# Altium PCB Morpheus_middle.PcbDoc (part 3 of 3)
Units mm, origin at the board's own origin, x right, y up, seen from the top; angles counter-clockwise.
Board outline 54.01 x 53.97 mm, 6 copper layers (Top Layer, Signal Layer 1, Signal Layer 2, GND, PWR, Bottom Layer), stack 0.657 mm thick; 151 components, 110 nets, 517 pads, 447 vias.
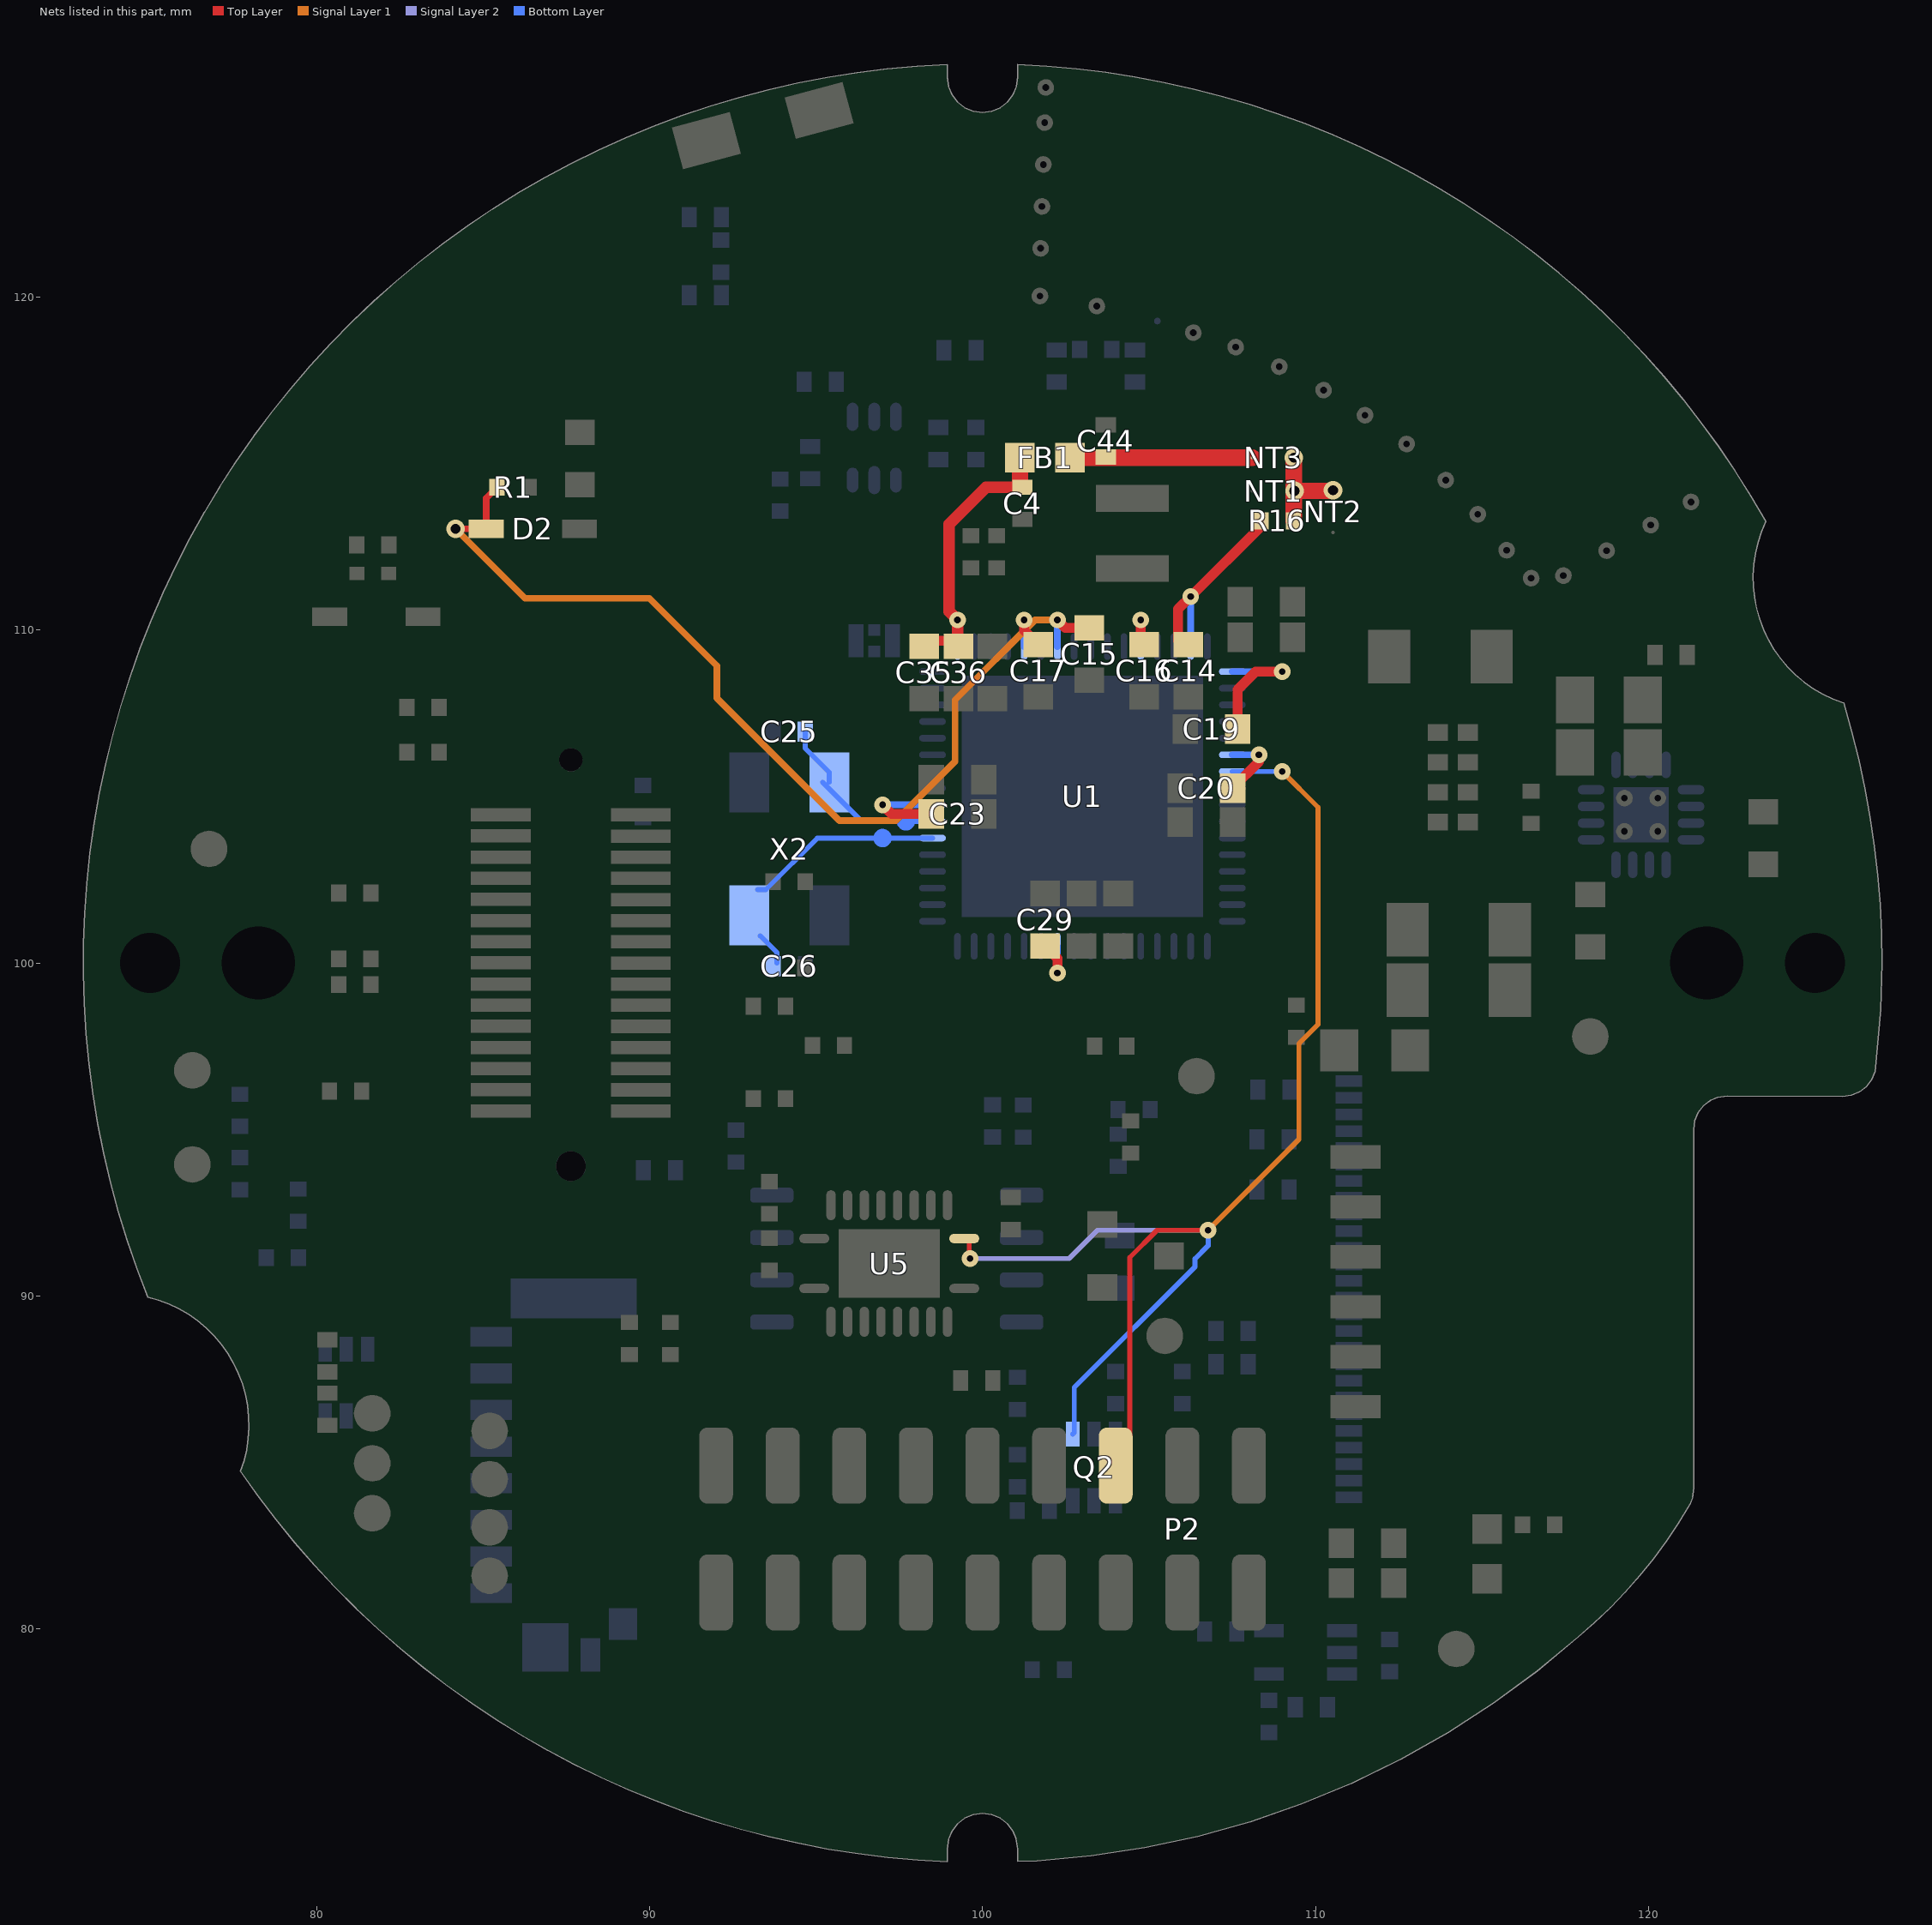
[diagram p7: the nets of this part, all layers, seen from the top]

## Via types
v1: diameter 0.559, hole 0.305, Top Layer to Bottom Layer, 105 vias
v2: diameter 0.5, hole 0.2, Top Layer to Bottom Layer, 104 vias
v3: diameter 0.5, hole 0.2, Top Layer to Bottom Layer, tented both sides, 66 vias
v4: diameter 0.51, hole 0.2, Top Layer to Bottom Layer, tented both sides, 64 vias
v5: diameter 0.51, hole 0.2, Top Layer to Bottom Layer, 58 vias
v6: diameter 0.6, hole 0.3, Top Layer to Bottom Layer, 33 vias
v7: diameter 0.559, hole 0.305, Top Layer to Bottom Layer, tented both sides, 16 vias
v8: diameter 0.559, hole 0.305, Top Layer to Bottom Layer, tented bottom, 1 vias

## Nets (pads, with @x,y where several pads share a name; then routed paths per layer and width w, separated by ;. In a path a pad name is that pad's centre, name@x,y a point inside that pad or via, vN(x,y) a via of type N, cw(c..) or ccw(c..) an arc to the next point about the centre after c; other vN are vias at no path point) (continued)
USB_TXD: P2.2 Q2.4 U1.55 U5.1 | length 42.1
  Top Layer w0.15: U5.1@99.6,91.725 99.6,91.15 v3(99.625,91.125) ; P2.2@104,84.905 104.425,85.33 104.425,91.158 105.242,91.975 v3(106.775,91.975)
  Signal Layer 1 w0.15: v3(106.775,91.975) 109.5,94.7 109.5,97.58 110.075,98.155 110.075,104.675 v2(109,105.75)
  Signal Layer 2 w0.15: v3(99.625,91.125) 102.6,91.125 103.45,91.975 v3(106.775,91.975)
  Bottom Layer w0.15: Q2.4@102.71,85.85 102.754,85.894 102.754,87.252 106.383,90.881 106.383,91.119 106.775,91.511 v3(106.775,91.975) ; U1.55@107.5,105.75 v2(109,105.75)
VBAT: C15.2 C16.2 C17.2 C20.2 C29.2 D2.1 NT1.1 NT2.1 NT3.2 R1.2 R16.1 U1.10 U1.37 U1.39 U1.44 U1.54 | length 40.3
  Top Layer w0.2: v7(84.176,113.035) D2.1@85.101,113.035 85.101,113.96 R1.2@85.426,114.285 ; C16.2@104.75,109.662 C16.2@104.85,109.562
  Top Layer w0.3: v2(101.25,110.3) 101.25,109.987 C17.2@101.675,109.562 ; C29.2@101.875,100.513 102.25,100.138 v2(102.25,99.7) ; v2(102.25,110.3) 102.488,110.062 C15.2@103.2,110.062 ; C16.2@104.75,109.662 v2(104.75,110.3) ; C20.2@107.5,105.25 108.3,106.05 v2(108.3,106.25)
  Top Layer w0.5: R16.1@109.35,113.275 NT1.1@109.35,114.175 ; v1(109.35,115.175) NT1.1@109.35,114.175 ; NT2.1@110.525,114.175 NT1.1@109.35,114.175
  Signal Layer 1 w0.2: v7(84.176,113.035) 86.261,110.95 89.997,110.95 92.021,108.926 92.021,107.958 95.704,104.275 97.397,104.275 99.175,106.053 99.175,107.896 101.579,110.3 v2(102.25,110.3)
  Bottom Layer w0.2: U1.37@101.25,109.5 v2(101.25,110.3) ; v2(102.25,99.7) U1.10@102.25,100.5 ; U1.39@102.25,109.5 v2(102.25,110.3) ; U1.44@104.75,109.5 v2(104.75,110.3) ; U1.54@107.5,106.25 v2(108.3,106.25)
  other v1: 109.37,114.175 110.525,114.195
VDD_ANA2: C14.2 R16.2 U1.47 | length 6.1
  Top Layer w0.3: C14.2@105.875,109.678 105.875,110.625 v2(106.25,111) 108.367,113.117 R16.2@108.367,113.275
  Bottom Layer w0.2: U1.47@106.25,109.5 v2(106.25,111)
VDD_PA_IN: C44.2 FB1.2 NT3.1 | length 5.6
  Top Layer w0.5: FB1.2@102.55,115.175 NT3.1@108.1,115.175
VDD_PA_IN_FILTERED: C4.2 C35.2 C36.2 FB1.1 U1.33 | length 8.9
  Top Layer w0.2: C36.2@99.2,109.675 C36.2@99.25,109.725
  Top Layer w0.3: C35.2@98.25,109.675 C36.2@99.2,109.675
  Top Layer w0.35: C36.2@99.25,109.725 v2(99.25,110.3) 99,110.55 99,113.175 100.108,114.283 C4.2@101.2,114.283
  Top Layer w0.5: C4.2@101.126,114.357 FB1.1@101.126,115.175
  Bottom Layer w0.2: U1.33@99.25,109.475 v2@99.25,110.275
VDD_PLL: C23.2 U1.24 | length 3.1
  Top Layer w0.3: v2(97,104.75) 97.275,104.475 C23.2@98.463,104.475
  Bottom Layer w0.2: v2(97,104.75) U1.24@98.5,104.75
VDD_RAM: C19.2 U1.49 | length 4.2
  Top Layer w0.3: C19.2@107.662,107.025 107.662,108.212 108.2,108.75 v2(109,108.75)
  Bottom Layer w0.2: U1.49@107.5,108.75 v2(109,108.75)
WLAN_XTALM: C26.2 U1.22 X2.3 | length 7.5
  Bottom Layer w0.15: X2.3@93.25,102.2 93.49,102.2 95.04,103.75 U1.22@98.5,103.75 ; X2.3@93.325,100.815 93.828,100.313 C26.2@93.828,100.003
  Bottom Layer w0.35: 97.1,103.75 ccw(c97,103.75) 97.1,103.75
WLAN_XTALP: C25.2 U1.23 X2.1 | length 6.2
  Bottom Layer w0.15: C25.2@94.678,106.95 94.678,106.447 95.4,105.725 X2.1@95.4,105.425 ; X2.1@95.2,105.425 96.369,104.256 97.694,104.256 97.7,104.25 U1.23@98.5,104.25
  Bottom Layer w0.35: 97.8,104.25 ccw(c97.7,104.25) 97.8,104.25
pads on no net: H1.1 H2.1 H3.1 H4.1 P5. RTC0.4 RTC0.7 U5.6 U5.7 U5.8 U5.9 U5.12 U5.13 U5.14 U5.15 U7.3 U7.6 U7.10

## Polygon pours and split planes (outlines as drawn)
GND on GND "GND on GND" (solid, remove dead copper, pour order 25): 82.175,79.708 cw(c95.759,96.008) 78.679,83.419 77.769,84.655 77.72,84.732 ccw(c74.023,86.125) 74.93,89.969 74.743,90.421 74.211,91.964 73.773,93.536 73.43,95.131 73.185,96.744 73.037,98.369 72.988,100 73.037,101.631 73.185,103.256 73.43,104.869 73.773,106.464 74.211,108.036 74.743,109.579 75.367,111.086 76.082,112.553 76.883,113.975 77.769,115.345 78.629,116.513 cw(c96.184,103.596) 82.11,120.238 83.341,121.264 84.655,122.231 86.026,123.117 87.447,123.918 88.914,124.633 90.421,125.257 91.964,125.789 93.536,126.227 95.131,126.57 96.744,126.815 98.369,126.963 98.941,126.98 98.941,126.6 98.977,126.326 99.083,126.071 99.251,125.851 99.47,125.683 99.726,125.577 100,125.541 100.274,125.577 100.53,125.683 100.749,125.851 100.917,126.071 101.023,126.326 101.059,126.6 101.05,126.981 101.631,126.963 103.256,126.815 104.869,126.57 106.465,126.227 108.036,125.789 109.579,125.257 111.086,124.633 112.553,123.918 113.975,123.117 115.345,122.231 116.659,121.264 117.89,120.238 cw(c104.737,104.456) 121.371,116.513 122.231,115.345 123.117,113.975 123.521,113.257 ccw(c127.087,111.558) 125.854,107.806 126.227,106.464 126.57,104.869 126.815,103.256 126.963,101.631 127.012,100 126.97,98.605 126.801,96.739 126.7,96.496 126.54,96.287 126.331,96.126 126.087,96.026 125.826,95.991 122.364,96 122.073,95.962 121.86,95.873 121.651,95.713 121.491,95.504 121.39,95.261 121.356,95 121.364,84.238 121.326,83.946 121.238,83.734 cw(c108.371,91.183) 117.89,79.762 116.659,78.736 115.345,77.769 113.975,76.883 112.553,76.082 111.086,75.367 109.579,74.743 108.036,74.211 106.465,73.773 104.869,73.43 103.256,73.185 101.631,73.037 101.05,73.019 101.05,73.4 101.01,73.706 100.917,73.93 100.749,74.149 100.53,74.317 100.274,74.423 100,74.459 99.726,74.423 99.47,74.317 99.251,74.149 99.083,73.93 98.977,73.674 98.941,73.4 98.95,73.02 98.352,73.038 96.744,73.185 95.131,73.43 93.536,73.773 91.964,74.211 90.421,74.743 88.914,75.367 87.447,76.082 86.026,76.883 84.655,77.769 83.341,78.736
GND on Top Layer "Top GND" (solid, remove dead copper, pour order 24): 82.175,79.708 cw(c95.759,96.008) 78.679,83.419 77.769,84.655 77.72,84.732 ccw(c74.023,86.125) 74.93,89.969 74.743,90.421 74.211,91.964 73.773,93.536 73.43,95.131 73.185,96.744 73.037,98.369 72.988,100 73.037,101.631 73.185,103.256 73.43,104.869 73.773,106.464 74.211,108.036 74.743,109.579 75.367,111.086 76.082,112.553 76.883,113.975 77.769,115.345 78.629,116.513 cw(c96.184,103.596) 82.11,120.238 83.341,121.264 84.655,122.231 86.026,123.117 87.447,123.918 88.914,124.633 90.421,125.257 91.964,125.789 93.536,126.227 95.131,126.57 96.744,126.815 98.369,126.963 98.941,126.98 98.941,126.6 98.977,126.326 99.083,126.071 99.251,125.851 99.47,125.683 99.726,125.577 100,125.541 100.274,125.577 100.53,125.683 100.749,125.851 100.917,126.071 101.023,126.326 101.059,126.6 101.05,126.981 101.631,126.963 103.256,126.815 104.869,126.57 106.465,126.227 108.036,125.789 109.579,125.257 111.086,124.633 112.553,123.918 113.975,123.117 115.345,122.231 116.659,121.264 117.89,120.238 cw(c104.737,104.456) 121.371,116.513 122.231,115.345 123.117,113.975 123.521,113.257 ccw(c127.087,111.558) 125.854,107.806 126.227,106.464 126.57,104.869 126.815,103.256 126.963,101.631 127.012,100 126.97,98.605 126.801,96.739 126.7,96.496 126.54,96.287 126.331,96.126 126.087,96.026 125.826,95.991 122.364,96 122.073,95.962 121.86,95.873 121.651,95.713 121.491,95.504 121.39,95.261 121.356,95 121.364,84.238 121.326,83.946 121.238,83.734 cw(c108.371,91.183) 117.89,79.762 116.659,78.736 115.345,77.769 113.975,76.883 112.553,76.082 111.086,75.367 109.579,74.743 108.036,74.211 106.465,73.773 104.869,73.43 103.256,73.185 101.631,73.037 101.05,73.019 101.05,73.4 101.01,73.706 100.917,73.93 100.749,74.149 100.53,74.317 100.274,74.423 100,74.459 99.726,74.423 99.47,74.317 99.251,74.149 99.083,73.93 98.977,73.674 98.941,73.4 98.95,73.02 98.352,73.038 96.744,73.185 95.131,73.43 93.536,73.773 91.964,74.211 90.421,74.743 88.914,75.367 87.447,76.082 86.026,76.883 84.655,77.769 83.341,78.736
1.8V on Top Layer "1.8V AT LDO on Top" (solid, remove dead copper, pour order 23): 115.263,106.125 115.263,107.188 115.275,107.2 115.475,107.4 115.475,107.402 116.223,107.402 116.347,107.525 116.347,108.209 116.525,108.387 116.538,108.4 116.775,108.4 117.777,108.4 118.149,108.028 118.149,106.099 117.9,105.85 115.453,105.85 115.262,106.041
1.8V on Top Layer "1.8V AT BULK CAP TOP" (solid, remove dead copper, pour order 21): 112.833,110 112.833,108.416 112.825,108.408 111.55,108.408 110.825,109.133 110.805,109.153 110.805,111.375 110.961,111.532 112.05,111.532 112.213,111.532 112.345,111.4 112.345,110.5
GND on Bottom Layer "Bottom GND" (solid, remove dead copper, pour order 22): 82.175,79.708 cw(c95.759,96.008) 78.679,83.419 77.769,84.655 77.72,84.732 ccw(c74.023,86.125) 74.93,89.969 74.743,90.421 74.211,91.964 73.773,93.536 73.43,95.131 73.185,96.744 73.037,98.369 72.988,100 73.037,101.631 73.185,103.256 73.43,104.869 73.773,106.464 74.211,108.036 74.743,109.579 75.367,111.086 76.082,112.553 76.883,113.975 77.769,115.345 78.629,116.513 cw(c96.184,103.596) 82.11,120.238 83.341,121.264 84.655,122.231 86.026,123.117 87.447,123.918 88.914,124.633 90.421,125.257 91.964,125.789 93.536,126.227 95.131,126.57 96.744,126.815 98.369,126.963 98.941,126.98 98.941,126.6 98.977,126.326 99.083,126.071 99.251,125.851 99.47,125.683 99.726,125.577 100,125.541 100.274,125.577 100.53,125.683 100.749,125.851 100.917,126.071 101.023,126.326 101.059,126.6 101.05,126.981 101.631,126.963 103.256,126.815 104.869,126.57 106.465,126.227 108.036,125.789 109.579,125.257 111.086,124.633 112.553,123.918 113.975,123.117 115.345,122.231 116.659,121.264 117.89,120.238 cw(c104.737,104.456) 121.371,116.513 122.231,115.345 123.117,113.975 123.521,113.257 ccw(c127.087,111.558) 125.854,107.806 126.227,106.464 126.57,104.869 126.815,103.256 126.963,101.631 127.012,100 126.97,98.605 126.801,96.739 126.7,96.496 126.54,96.287 126.331,96.126 126.087,96.026 125.826,95.991 122.364,96 122.073,95.962 121.86,95.873 121.651,95.713 121.491,95.504 121.39,95.261 121.356,95 121.364,84.238 121.326,83.946 121.238,83.734 cw(c108.371,91.183) 117.89,79.762 116.659,78.736 115.345,77.769 113.975,76.883 112.553,76.082 111.086,75.367 109.579,74.743 108.036,74.211 106.465,73.773 104.869,73.43 103.256,73.185 101.631,73.037 101.05,73.019 101.05,73.4 101.01,73.706 100.917,73.93 100.749,74.149 100.53,74.317 100.274,74.423 100,74.459 99.726,74.423 99.47,74.317 99.251,74.149 99.083,73.93 98.977,73.674 98.941,73.4 98.95,73.02 98.352,73.038 96.744,73.185 95.131,73.43 93.536,73.773 91.964,74.211 90.421,74.743 88.914,75.367 87.447,76.082 86.026,76.883 84.655,77.769 83.341,78.736
1.8V on Bottom Layer "1.8V AT LDO on BOT" (solid, remove dead copper, pour order 19): 118.275,105.2 118.275,104.5 117.35,104.5 116.344,105.175 116.203,105.85 115.413,105.85 115.325,105.936 115.325,107.338 115.425,107.436 116.166,107.521 116.166,108.065 116.35,108.331 116.942,108.331 117.134,108.065 117.134,107.66 118.025,106.874 118.025,105.375 118.254,105.375 118.275,105.354
3.3V on Bottom Layer "3.3V" (solid, remove dead copper, pour order 18): 118.2,104.375 118.325,104.325 118.325,103.564 118.752,103.101 119.154,103.1 119.175,103.088 119.175,102.765 118.621,102.211 116.686,102.211 116.5,102.397 116.5,104.107 116.501,104.107 116.769,104.375
1.8V on Bottom Layer "1.8V AT BULK CAP BOT" (solid, remove dead copper, pour order 20): 112.833,110 112.833,108.416 112.825,108.408 111.55,108.408 110.825,109.133 110.805,109.153 110.805,111.375 110.961,111.532 112.05,111.532 112.213,111.532 112.345,111.4 112.345,110.5
GND on Signal Layer 2 "Sig2 GND" (solid, remove dead copper, pour order 17): 98.95,73.02 98.941,73.4 98.977,73.674 99.083,73.93 99.251,74.149 99.47,74.317 99.726,74.423 100,74.459 100.274,74.423 100.53,74.317 100.749,74.149 100.917,73.93 101.01,73.706 101.05,73.4 101.05,73.019 101.631,73.037 103.256,73.185 104.869,73.43 106.465,73.773 108.036,74.211 109.579,74.743 111.086,75.367 112.553,76.082 113.975,76.883 115.345,77.769 116.659,78.736 117.89,79.762 ccw(c108.371,91.183) 121.238,83.734 121.326,83.946 121.364,84.238 121.356,95 121.39,95.261 121.491,95.504 121.651,95.713 121.86,95.873 122.073,95.962 122.364,96 125.826,95.991 126.087,96.026 126.331,96.126 126.54,96.287 126.7,96.496 126.801,96.739 126.97,98.605 127.012,100 ccw(c100,100) 125.859,107.808 125.854,107.806 cw(c127.087,111.558) 123.521,113.257 ccw(c100,100) 101.05,126.98 101.05,126.981 101.059,126.6 101.023,126.326 100.917,126.071 100.749,125.851 100.53,125.683 100.274,125.577 100,125.541 99.726,125.577 99.47,125.683 99.251,125.851 99.083,126.071 98.977,126.326 98.941,126.6 98.941,126.98 ccw(c100,100) 74.931,89.97 74.93,89.969 cw(c74.023,86.125) 77.72,84.732 ccw(c99.991,100.005)
GND on Signal Layer 1 "Sig1 GND" (solid, remove dead copper, pour order 15): 98.95,73.02 98.941,73.4 98.977,73.674 99.083,73.93 99.251,74.149 99.47,74.317 99.726,74.423 100,74.459 100.274,74.423 100.53,74.317 100.749,74.149 100.917,73.93 101.01,73.706 101.05,73.4 101.05,73.019 101.631,73.037 103.256,73.185 104.869,73.43 106.465,73.773 108.036,74.211 109.579,74.743 111.086,75.367 112.553,76.082 113.975,76.883 115.345,77.769 116.659,78.736 117.89,79.762 ccw(c108.371,91.183) 121.238,83.734 121.326,83.946 121.364,84.238 121.356,95 121.39,95.261 121.491,95.504 121.651,95.713 121.86,95.873 122.073,95.962 122.364,96 125.826,95.991 126.087,96.026 126.331,96.126 126.54,96.287 126.7,96.496 126.801,96.739 126.97,98.605 127.012,100 ccw(c100,100) 125.859,107.808 125.854,107.806 cw(c127.087,111.558) 123.521,113.257 ccw(c100,100) 101.05,126.98 101.05,126.981 101.059,126.6 101.023,126.326 100.917,126.071 100.749,125.851 100.53,125.683 100.274,125.577 100,125.541 99.726,125.577 99.47,125.683 99.251,125.851 99.083,126.071 98.977,126.326 98.941,126.6 98.941,126.98 ccw(c100,100) 74.931,89.97 74.93,89.969 cw(c74.023,86.125) 77.72,84.732 ccw(c99.991,100.005)
GND on PWR "GND" (solid, remove dead copper, pour order 16): 94.6,126.7 89.625,125 85.3,122.875 85.3,122.873 94.7,108.85 98,106.075 98,105.325 99.725,103.35 101.2,103.35 101.2,105.5 101.2,106.825 101.2,107.825 100.2,110.325 98.75,111.625 98.75,112.975 100.85,115.575 110.25,115.575 112.6,113.325 114.525,111.875 116.4,110.8 117.322,110.73 122.993,114.15 121.9,115.8 120.675,117.4 119.101,119.101 117.725,120.4 116.002,121.747 114.1,123.075 111.879,124.325 109.55,125.275 106.95,126.125 104.375,126.675 101.975,127 99.525,127.075
1.8V on PWR "1.8V" (solid, remove dead copper, pour order 26): 82.175,79.708 cw(c95.759,96.008) 78.679,83.419 77.769,84.655 77.72,84.732 ccw(c74.023,86.125) 74.93,89.969 74.743,90.421 74.211,91.964 73.773,93.536 73.43,95.131 73.185,96.744 73.037,98.369 72.988,100 73.037,101.631 73.185,103.256 73.43,104.869 73.773,106.464 74.211,108.036 74.743,109.579 75.367,111.086 76.082,112.553 76.883,113.975 77.769,115.345 78.629,116.513 cw(c96.184,103.596) 82.11,120.238 83.341,121.264 84.655,122.231 86.026,123.117 87.447,123.918 88.914,124.633 90.421,125.257 91.964,125.789 93.536,126.227 95.131,126.57 96.744,126.815 98.369,126.963 98.941,126.98 98.941,126.6 98.977,126.326 99.083,126.071 99.251,125.851 99.47,125.683 99.726,125.577 100,125.541 100.274,125.577 100.53,125.683 100.749,125.851 100.917,126.071 101.023,126.326 101.059,126.6 101.05,126.981 101.631,126.963 103.256,126.815 104.869,126.57 106.465,126.227 108.036,125.789 109.579,125.257 111.086,124.633 112.553,123.918 113.975,123.117 115.345,122.231 116.659,121.264 117.89,120.238 cw(c104.737,104.456) 121.371,116.513 122.231,115.345 123.117,113.975 123.521,113.257 ccw(c127.087,111.558) 125.854,107.806 126.227,106.464 126.57,104.869 126.815,103.256 126.963,101.631 127.012,100 126.97,98.605 126.801,96.739 126.7,96.496 126.54,96.287 126.331,96.126 126.087,96.026 125.826,95.991 122.364,96 122.073,95.962 121.86,95.873 121.651,95.713 121.491,95.504 121.39,95.261 121.356,95 121.364,84.238 121.326,83.946 121.238,83.734 cw(c108.371,91.183) 117.89,79.762 116.659,78.736 115.345,77.769 113.975,76.883 112.553,76.082 111.086,75.367 109.579,74.743 108.036,74.211 106.465,73.773 104.869,73.43 103.256,73.185 101.631,73.037 101.05,73.019 101.05,73.4 101.01,73.706 100.917,73.93 100.749,74.149 100.53,74.317 100.274,74.423 100,74.459 99.726,74.423 99.47,74.317 99.251,74.149 99.083,73.93 98.977,73.674 98.941,73.4 98.95,73.02 98.352,73.038 96.744,73.185 95.131,73.43 93.536,73.773 91.964,74.211 90.421,74.743 88.914,75.367 87.447,76.082 86.026,76.883 84.655,77.769 83.341,78.736
VBAT on PWR "VBAT" (solid, pour order 14): 101.557,99.05 101.55,107 100.25,110.3 100.825,111.025 101.575,111.775 103.075,113.275 105.325,115.525 110.1,115.525 110.95,114.675 110.95,113.825 109.652,113.82 109.652,104.175 108.05,102.575 108.044,100.35 108.05,100.35 106.75,99.05

## Keep-outs
Keep-Out Layer:
  lines w0.15: 74.93,89.969 cw(c74.023,86.125) 77.72,84.732 ccw(c100,100) 98.95,73.011 ; 74.931,89.97 cw(c100,100) 98.941,126.98 98.941,126.6 98.977,126.326 99.083,126.071 99.251,125.851 99.471,125.683 99.726,125.577 100,125.541 100.274,125.577 100.53,125.683 100.749,125.851 100.917,126.071 101.023,126.326 101.059,126.6 101.05,126.981 ; 98.95,73.02 98.941,73.4 98.977,73.674 99.083,73.929 99.251,74.149 99.471,74.317 99.726,74.423 100,74.459 100.274,74.423 100.53,74.317 100.749,74.149 100.917,73.929 101.01,73.706 101.05,73.4 101.05,73.019 101.631,73.037 103.256,73.185 104.869,73.43 106.465,73.773 108.036,74.211 109.579,74.743 111.086,75.367 112.553,76.082 113.975,76.883 115.345,77.769 116.659,78.736 117.89,79.762 ccw(c108.371,91.183) 121.238,83.734 121.326,83.946 121.364,84.238 121.356,95 121.39,95.261 121.491,95.504 121.651,95.713 121.86,95.874 122.073,95.962 122.364,96 125.826,95.991 126.087,96.026 126.331,96.127 126.54,96.287 126.7,96.496 126.801,96.739 126.97,98.605 127.012,100 ccw(c100,100) 125.859,107.808 ; 101.05,126.98 cw(c100,100) 123.521,113.257 ccw(c127.087,111.558) 125.854,107.806

## Other copper
Bottom Layer:
  rectangle net GND: 95.8,109.175 96,110.175
  region net GND: 97.95,110.175 97.5,110.175 97.5,109.175 97.95,109.175
  rectangle net GND: 102.675,119.35 103.25,120.1
  pour cut-out: 98.85,107.325 97.85,107.325 cw(c97.85,109.35) 95.825,109.35 95.825,111.5 95.825,114.823 cw(c96.002,114.823) 96.002,115 97.498,115 cw(c97.498,114.823) 97.675,114.823 97.675,113.556 97.675,109.35 ccw(c97.85,109.35) 97.85,109.175 98.85,109.175
  pour cut-out: 97.498,115.9 ccw(c97.498,116.077) 97.675,116.077 cw(c98,116.077) 98,116.402 ccw(c98,116.729) 98.327,116.729 98.327,116.962 cw(c98.84,116.962) 98.84,117.475 99.808,117.475 102.225,117.5 103.883,117.5 104.608,117.5 ccw(c104.608,119.036) 106.144,119.036 106.2,119.25 104.425,119.75 104.357,119.514 cw(c103.96,119.911) 103.96,119.35 103.883,119.35 102.225,119.35 99.808,119.325 98.842,119.325 ccw(c98.842,117.233) 96.75,117.233 96.75,115.9
  pour cut-out: 89.817,125 93.117,126.025 93.775,123.6 93.075,123.225 93.083,120.05 93.083,119.935 ccw(c94.642,119.935) 94.642,118.375 95.608,118.375 cw(c95.608,117.233) 96.75,117.233 96.75,115.9 96.002,115.9 cw(c96.002,116.077) 95.825,116.077 ccw(c95.377,116.077) 95.377,116.525 94.642,116.525 93.85,116.601 93.117,116.875 92.575,117.233 92.05,117.7 91.635,118.312 91.323,119.101 91.233,119.935 91.233,120.05 91.225,123.225 90.35,123.225
Multi-Layer:
  pour cut-out: 102.675,108.95 103.725,108.95 103.725,108.75 105.65,108.75 105.65,107.175 105.3,106.825 102.155,106.829 102.154,107.425 101.175,107.425 101.175,108.5 102.675,108.5
  pour cut-out: 93.117,126.025 93.775,123.6 93.075,123.225 93,122.975 92.9,122.75 92.725,122.55 92.5,122.425 92.225,122.35 91.9,122.375 91.65,122.5 91.45,122.675 91.3,122.925 91.225,123.225 90.35,123.225 89.817,125 91.433,125.603

## Silkscreen, mask and mechanical layers (free items; w line width, h text height)
Bottom Overlay:
  region: 84.972,108.751 84.307,108.751 ccw(c84.64,108.751) 84.64,108.419 ccw(c84.64,108.751) 84.972,108.751
  region: 85.305,108.086 85.305,109.084 ccw(c84.973,109.084) 84.973,109.417 84.307,109.417 ccw(c84.307,109.084) 83.974,109.084 83.974,108.418 ccw(c84.307,108.418) 84.307,108.086 85.305,108.086 84.64,108.254 ccw(c84.64,108.751) 85.137,108.751 ccw(c84.64,108.751) 84.64,109.248 ccw(c84.64,108.751) 84.143,108.751 ccw(c84.64,108.751) 84.64,108.254
  lines w0.01: 83.974,108.418 ccw(c84.307,108.418) 84.307,108.086 84.64,108.086 85.305,108.086 85.305,109.084 ccw(c84.973,109.084) 84.973,109.417 84.307,109.417 ccw(c84.307,109.084) 83.974,109.084 83.974,108.418 ; 84.143,108.751 ccw(c84.64,108.751) 84.64,108.254 ccw(c84.64,108.751) 85.137,108.751 ccw(c84.64,108.751) 84.64,109.248 ccw(c84.64,108.751) 84.143,108.751 ; 84.307,108.751 ccw(c84.64,108.751) 84.64,108.419 ccw(c84.64,108.751) 84.972,108.751 84.307,108.751
  text "Model MA14214" at 88.3,109.85 h0.7
  text "2015   Hello Inc." at 88.3,108.4 h0.7
  text "905-00004-A" at 88.3,106.925 h0.7
Mechanical 1:
  lines w0.15: 74.93,89.969 cw(c74.023,86.125) 77.72,84.732 ; 74.931,89.97 cw(c100,100) 98.941,126.98 98.941,126.6 98.977,126.326 99.083,126.071 99.251,125.851 99.471,125.683 99.726,125.577 100,125.541 100.274,125.577 100.53,125.683 100.749,125.851 100.917,126.071 101.023,126.326 101.059,126.6 101.05,126.981 ; 77.719,84.732 ccw(c100,100) 98.95,73.01 ; 98.95,73.02 98.941,73.4 98.977,73.674 99.083,73.929 99.251,74.149 99.471,74.317 99.726,74.423 100,74.459 100.274,74.423 100.53,74.317 100.749,74.149 100.917,73.929 101.01,73.706 101.05,73.4 101.05,73.019 101.631,73.037 103.256,73.185 104.869,73.43 106.465,73.773 108.036,74.211 109.579,74.743 111.086,75.367 112.553,76.082 113.975,76.883 115.345,77.769 116.659,78.736 117.89,79.762 ccw(c108.371,91.183) 121.238,83.734 121.326,83.946 121.364,84.238 121.356,95 121.39,95.261 121.491,95.504 121.651,95.713 121.86,95.874 122.073,95.962 122.364,96 125.826,95.991 126.087,96.026 126.331,96.127 126.54,96.287 126.7,96.496 126.801,96.739 126.97,98.605 127.012,100 ccw(c100,100) 125.859,107.808 ; 101.05,126.98 cw(c100,100) 123.521,113.257 ccw(c127.087,111.558) 125.854,107.806
Mechanical 15:
  lines w0.004: 90.776,125.484 cw(c99.988,99.998) 92.201,125.955 cw(c99.988,99.998) 94.136,126.459 ; 92.133,125.877 92.17,125.731 92.39,124.868 90.937,124.497 90.776,125.483 ; 95.634,126.594 95.778,125.714 ; 90.776,125.483 90.776,125.483 ; 90.776,125.483 90.8,125.333 90.776,125.483 ; 94.136,126.459 cw(c99.988,99.998) 95.609,126.742 95.778,125.714 ; 94.136,126.459 94.161,126.31 94.298,125.472 ; 94.136,126.459 94.298,125.472 ; 94.298,125.472 95.778,125.714 ; 90.069,124.777 90.069,124.777
  lines w0.05: 89.425,89.775 99.225,89.775 99.225,78.775 89.425,78.775 89.425,78.925 ; 89.425,78.925 83.925,78.925 83.925,90.325 89.425,90.325 89.425,78.925 ; 97.8,107.725 97.8,110.325 98.7,110.325 98.7,107.725 97.8,107.725
Mechanical 16:
  lines w0.05: 89.817,125 90.35,123.225 91.225,123.225 ; 91.233,120.05 92.158,120.05 93.083,120.05 ; 93.117,126.025 93.775,123.6 93.075,123.225 ; 95.173,116.962 96.098,116.962 97.023,116.962 ; 95.175,116.4 96.1,116.4 97.025,116.4 ; 95.608,116.525 95.608,117.45 95.608,118.375 ; 96.475,116.4 97.4,116.4 98.325,116.4 ccw(c98.325,116.402) 98.327,116.402 ; 96.477,116.962 97.402,116.962 98.327,116.962 ; 91.225,123.225 92.15,123.225 93.075,123.225 ; 91.225,123.225 91.233,122.4 ; 91.233,122.4 ccw(c91.233,122.4) 91.233,122.4 ; 91.233,122.4 92.158,122.4 93.083,122.4 ; 91.233,122.4 91.233,119.935 ccw(c94.642,119.935) 94.642,116.525 ; 93.075,123.225 93.083,122.4 ; 93.083,122.4 ccw(c93.083,122.4) 93.083,122.4 ; 93.083,122.4 93.083,119.935 ccw(c94.642,119.935) 94.642,118.375 ; 94.642,116.525 94.642,117.45 94.642,118.375 ; 94.642,116.525 95.377,116.525 cw(c95.377,116.077) 95.825,116.077 ccw(c96.002,116.077) 96.002,115.9 97.498,115.9 ccw(c97.498,116.077) 97.675,116.077 cw(c98,116.077) 98,116.402 ccw(c98,116.729) 98.327,116.729 98.327,116.96 cw(c98.842,116.96) 98.842,117.475 ; 94.642,118.375 95.608,118.375 ; 95.608,118.375 cw(c95.608,117.233) 96.75,117.233 ; 95.825,109.35 ccw(c97.85,109.35) 97.85,107.325 ; 95.825,109.35 95.825,111.5 ; 95.825,109.35 96.75,109.35 97.675,109.35 ; 95.825,111.5 95.825,113.556 ; 95.825,111.5 95.825,111.5 ; 95.825,111.5 96.75,111.5 97.675,111.5 ; 95.825,113.556 96.75,113.556 97.675,113.556 ; 95.825,113.556 95.825,114.823 cw(c96.002,114.823) 96.002,115 97.498,115 cw(c97.498,114.823) 97.675,114.823 97.675,113.556 ; 96.75,117.233 cw(c98.842,117.233) 98.842,119.325 ; 96.75,117.233 96.75,116.962 96.75,117.233 ; 97.675,109.35 ccw(c97.85,109.35) 97.85,109.175 ; 97.675,109.35 97.675,111.5 ; 97.675,111.5 97.675,113.556 ; 97.675,111.5 97.675,111.5 ; 97.675,113.556 97.675,113.556 ; 97.85,107.325 98.85,107.325 98.85,108.25 98.85,109.175 97.85,109.175 ; 97.85,107.325 97.85,108.25 97.85,109.175 ; 98.842,117.475 98.842,118.4 98.842,119.325 ; 98.842,117.475 99.808,117.475 ; 98.842,119.325 99.808,119.325 ; 99.808,117.475 99.808,118.4 99.808,119.325 ; 99.808,117.475 102.225,117.5 ; 99.808,119.325 102.225,119.35 ; 102.225,117.5 102.225,118.425 102.225,119.35 ; 102.225,117.5 102.917,117.5 ; 102.225,119.35 102.917,119.35 ; 102.917,117.5 102.917,118.425 102.917,119.35 ; 102.917,117.5 103.883,117.5 ; 102.917,119.35 103.883,119.35 ; 103.883,117.5 103.883,118.425 103.883,119.35 ; 103.883,117.5 104.575,117.5 104.608,117.5 ccw(c104.608,119.036) 106.144,119.036 ; 103.883,119.35 103.96,119.35 ccw(c103.96,119.911) 104.357,119.514 ; 104.357,119.514 105.25,119.275 106.144,119.036 ; 104.357,119.514 104.425,119.75 106.2,119.25 106.144,119.036
Drill Drawing:
  drawing of 3415 lines, arcs and shapes, not listed
  text "6" at 115.636,286.171 h2.38
  text "5" at 165.928,286.185 h2.38
  text "2" at 316.355,286.157 h2.38
  text "4" at 216.362,286.143 h2.38
  text "8" at 14.3,286.038 h2.38
  text "1" at 367.825,286.001 h2.38
  text "3" at 266.361,285.987 h2.38
  text "7" at 66.164,285.965 h2.38
  text "Fabrication / Assembly Notes" at 75.178,272.937 h3
  text "1. Material: Rigid FR-4, RoHS compliant: material should meet or exceed requirements of IPC 4101/126.  ITEQ IT-180A Pre-approved." at 75.178,269.937 h1.52
  text "2. Number of electrical layers: 6" at 75.178,266.937 h1.52
  text "3. Trace / Space minimum: 5mil (all layers)" at 75.178,263.937 h1.52
  text "4. Thickness: 0.782mm (31mils) +/- 0.1mm finished" at 75.178,260.937 h1.52
  text "5. Finish:  ENIG plating on exposed copper" at 75.178,257.937 h1.52
  text "6. Soldermask: per IPC-SM-840, color matte black, registration within +/- 76um of circuit layer" at 75.178,254.937 h1.52
  text "D" at 394.849,251.989 h2.38
  text "7. Silkscreen: do printed silkscreen on top and bottom layers, color white.  Clip on pads." at 75.178,251.937 h1.52
  text "D" at -13.144,251.139 h2.38
  text "8. Board must be lead free process compatible and able to withstand minimum of" at 75.175,249.125 h1.52
  text "5 cycles at 250 degrees celsius" at 79.475,246.475 h1.52
  text "9. All Test/QA/QC markings to be made on back side of PCB" at 75.175,243.55 h1.52
  text "10. x mousebites shall be no larger than 0.05 mm" at 75.175,240.825 h1.52
  text "11. All Dimensions are after plating/finishing" at 75.1,238.2 h1.52
  text "12. All components must be placed within +/- 0.10mm" at 75.1,235.3 h1.52
  text "13. This board has controlled impedences between Layers 5 and 6." at 75.1,232.1 h1.52
  text "0.45mm traces on Bottom layer (layer 6) are 50 ohm +/-5 Ohm controlled impedence traces referenced to layer 5." at 80.65,229.45 h1.52
  text "Fab vendor to adjust trace width as needed but no smaller than .125mm without approval." at 80.6,226.6 h1.52
  text "Layer" at 76.249,219.373 h1.52
  text "Name" at 86.661,219.373 h1.52
  text "Material" at 110.53,219.373 h1.52
  text "Thickness" at 132.368,219.373 h1.52
  text "Constant" at 148.874,219.373 h1.52
  text "Board Layer Stack" at 163.348,219.373 h1.52
  text "1" at 76.249,216.325 h1.52
  text "Top Paste" at 86.661,216.325 h1.52
  text "2" at 76.249,213.277 h1.52
  text "Top Overlay" at 86.661,213.277 h1.52
  text "3" at 76.249,210.229 h1.52
  text "Top Solder" at 86.661,210.229 h1.52
  text "Solder Resist" at 110.53,210.229 h1.52
  text "0.010mm" at 132.368,210.229 h1.52
  text "3.5" at 148.874,210.229 h1.52
  text "4" at 76.249,207.181 h1.52
  text "Top Layer" at 86.661,207.181 h1.52
  text "Copper" at 110.53,207.181 h1.52
  text "0.025mm" at 132.368,207.181 h1.52
  text "5" at 76.249,204.133 h1.52
  text "Dielectric1" at 86.661,204.133 h1.52
  text "FR-4" at 110.53,204.133 h1.52
  text "0.102mm" at 132.368,204.133 h1.52
  text "4.2" at 148.874,204.133 h1.52
  text "6" at 76.249,201.085 h1.52
  text "Signal Layer 1" at 86.661,201.085 h1.52
  text "Copper" at 110.53,201.085 h1.52
  text "0.025mm" at 132.368,201.085 h1.52
  text "7" at 76.249,198.037 h1.52
  text "Dielectric 5" at 86.661,198.037 h1.52
  text "0.152mm" at 132.368,198.037 h1.52
  text "4.2" at 148.874,198.037 h1.52
  text "8" at 76.249,194.989 h1.52
  text "Signal Layer 2" at 86.661,194.989 h1.52
  text "Copper" at 110.53,194.989 h1.52
  text "0.025mm" at 132.368,194.989 h1.52
  text "9" at 76.249,191.941 h1.52
  text "Dielectric 4" at 86.661,191.941 h1.52
  text "0.102mm" at 132.368,191.941 h1.52
  text "4.2" at 148.874,191.941 h1.52
  text "10" at 76.249,188.893 h1.52
  text "GND" at 86.661,188.893 h1.52
  text "Copper" at 110.53,188.893 h1.52
  text "0.025mm" at 132.368,188.893 h1.52
  text "C" at -13.177,186.44 h2.38
  text "C" at 394.337,186.307 h2.38
  text "11" at 76.249,185.845 h1.52
  text "Dielectric2" at 86.661,185.845 h1.52
  text "0.152mm" at 132.368,185.845 h1.52
  text "4.2" at 148.874,185.845 h1.52
  text "12" at 76.249,182.797 h1.52
  text "PWR" at 86.661,182.797 h1.52
  text "Copper" at 110.53,182.797 h1.52
  text "0.025mm" at 132.368,182.797 h1.52
  text "13" at 76.249,179.749 h1.52
  text "Dielectric3" at 86.661,179.749 h1.52
  text "0.102mm" at 132.368,179.749 h1.52
  text "4.2" at 148.874,179.749 h1.52
  text "14" at 76.249,176.701 h1.52
  text "Bottom Layer" at 86.661,176.701 h1.52
  text "Copper" at 110.53,176.701 h1.52
  text "0.025mm" at 132.368,176.701 h1.52
  text "15" at 76.249,173.653 h1.52
  text "Bottom Solder" at 86.661,173.653 h1.52
  text "Solder Resist" at 110.53,173.653 h1.52
  text "0.010mm" at 132.368,173.653 h1.52
  text "3.5" at 148.874,173.653 h1.52
  text "16" at 76.249,170.605 h1.52
  text "Bottom Overlay" at 86.661,170.605 h1.52
  text "17" at 76.249,167.557 h1.52
  text "Bottom Paste" at 86.661,167.557 h1.52
  text "Symbol" at 246.426,146.43 h1.83
  text "Hit Count" at 259.276,146.43 h1.83
  text "Finished Hole Size" at 277,146.43 h1.83
  text "Plated" at 311.178,146.43 h1.83
  text "Hole Type" at 324.028,146.43 h1.83
  text "1" at 259.276,142.62 h1.52
  text "0.700mm (27.56mil)" at 277,142.62 h1.52
  text "NPTH" at 311.178,142.62 h1.52
  text "Round" at 324.028,142.62 h1.52
  text "1" at 259.276,138.81 h1.52
  text "0.900mm (35.43mil)" at 277,138.81 h1.52
  text "NPTH" at 311.178,138.81 h1.52
  text "Round" at 324.028,138.81 h1.52
  text "2" at 259.276,135 h1.52
  text "1.800mm (70.87mil)" at 277,135 h1.52
  text "NPTH" at 311.178,135 h1.52
  text "Round" at 324.028,135 h1.52
  text "2" at 259.276,131.19 h1.52
  text "2.200mm (86.61mil)" at 277,131.19 h1.52
  text "NPTH" at 311.178,131.19 h1.52
  text "Round" at 324.028,131.19 h1.52
  text "2 X" at 75.931,130.281 h1
  text "R1.06" at 79.567,130.281 h1
  text "+/-0.05" at 84.958,130.281 h1
  text "+/-0.10" at 124.269,127.845 h1
  text "54" at 121.23,127.819 h1
  text "33" at 259.276,127.38 h1.52
  text "0.300mm (11.81mil)" at 277,127.38 h1.52
  text "PTH" at 311.178,127.38 h1.52
  text "Round" at 324.028,127.38 h1.52
  text "122" at 259.276,123.57 h1.52
  text "0.305mm (12.01mil)" at 277,123.57 h1.52
  text "PTH" at 311.178,123.57 h1.52
  text "Round" at 324.028,123.57 h1.52
  text "B" at -13.2,122.506 h2.38
  text "B" at 395.361,122.146 h2.38
  text "* = mousebite locations" at 38.45,121.2 h1.52
  text "2 X R3.95" at 137.064,120.87 h1
  text "+/-0.03" at 146.769,120.845 h1
  text "317" at 259.276,119.76 h1.52
  text "0.200mm (7.87mil)" at 277,119.76 h1.52
  text "PTH" at 311.178,119.76 h1.52
  text "Round" at 324.028,119.76 h1.52
  text "*" at 77.725,116.175 h1.8
  text "478 Total" at 259.276,115.95 h1.52
  text "2.20" at 48.457,108.668 h1
  text "+/-0.05" at 52.562,108.668 h1
  text "2 X" at 43.469,108.645 h1
  text "2 X 23 Degrees" at 133.169,106.745 h1
  text "2 X" at 43.427,103.883 h1
  text "1.80" at 48.457,103.883 h1
  text "+/-0.05" at 52.562,103.883 h1
  text "*" at 127.275,100.85 h1.8
  text "2 X" at 142.654,86.124 h1
  text "26.60" at 146.29,86.124 h1
  text "+/-0.05" at 151.568,86.124 h1
  text "*" at 91.375,72.925 h1.8
  text "DATE" at 302.269,69.245 h1
  text "DRAFTER" at 279.569,69.145 h1
  text "METRIC" at 255.669,68.245 h1.78
  text "DIMENSIONS ARE IN MILLIMETERS" at 246.247,62.595 h1
  text "21.75" at 57.926,62.561 h1
  text "+/-0.03" at 63.204,62.561 h1
  text "21.75" at 133.228,62.561 h1
  text "+/-0.03" at 138.507,62.561 h1
  text "DATE" at 302.269,62.045 h1
  text "DESIGNER" at 279.569,61.945 h1
  text "TOLERANCES:" at 246.247,60.124 h1
  text "rsb/dfusi" at 282,59 h1.52
  text "01/12/15" at 304,59 h1.52
  text "0.10" at 267.498,57.425 h1.5
  text "0 > - < 2" at 250.08,57.318 h1.5
  text "TITLE:" at 324.2,56.5 h2.54
  text "A" at 394.614,55.942 h2.38
  text "A" at -13.21,55.516 h2.38
  text "2 > - < 10" at 250.008,54.511 h1.5
  text "0.10" at 267.498,54.511 h1.5
  text "Morpheus Middle Board" at 327.2,51.7 h3
  text "10 > - < 50" at 248.9,51.487 h1.5
  text "0.10" at 267.498,51.487 h1.5
  text "21.35" at 133.053,50.551 h1
  text "+/-0.03" at 138.469,50.545 h1
  text "PROPRIETARY AND CONFIDENTIAL" at 280.069,50.345 h1.5
  text "50 > - < 100" at 248.973,48.516 h1.5
  text "0.15" at 267.498,48.516 h1.5
  text "100 > - < 200" at 247.865,45.438 h1.5
  text "0.20" at 267.498,45.438 h1.5
  text "THE INFORMATION CONTAINED IN" at 281.951,44.882 h1.25
  text "25" at 81.966,43.561 h1
  text "+/-0.03" at 84.312,43.561 h1
  text "25" at 108.573,43.461 h1
  text "+/-0.03" at 110.919,43.461 h1
  text "THIS DRAWING IS THE SOLE" at 281.951,42.132 h1.25
  text "200 > -" at 247.865,41.993 h1.5
  text "0.20" at 267.498,41.993 h1.5
  text "PROPERTY OF HELLO INC." at 281.951,39.382 h1.25
  text "ANGLES" at 250.07,37.429 h1.5
  text "1.00" at 267.498,37.407 h1.5
  text "REV" at 381.769,36.245 h2
  text "SIZE" at 323.369,36.045 h2
  text "DWG.  NO." at 333.069,36.045 h2
  text "ANY REPRODUCTION IN PART OR" at 281.951,33.882 h1.25
  text "AS A WHOLEWITHOUT THE" at 281.951,31.132 h1.25
  text "201-00004-A" at 336.8,31.1 h2
  text "WRITTEN PERMISSION OF HELLO" at 281.951,28.382 h1.25
  text "B" at 324.869,28.245 h6.35
  text "INC IS PROHIBITED." at 281.951,25.632 h1.25
  text "SCALE: 1:1" at 323.469,22.645 h1.75
  text "WEIGHT:" at 344.369,22.545 h1.75
  text "SHEET 1 OF 1" at 369.969,22.345 h1.75
  text "4" at 214.569,18.045 h2.38
  text "8" at 14.769,17.945 h2.38
  text "7" at 66.369,17.945 h2.38
  text "6" at 116.169,17.945 h2.38
  text "5" at 166.069,17.945 h2.38
  text "3" at 264.969,17.945 h2.38
  text "2" at 315.069,17.945 h2.38
  text "1" at 367.369,17.845 h2.38